# Altium PCB PCB2.PcbDoc
Units mil, origin at the board's own origin, x right, y up, seen from the top; angles counter-clockwise.
Board outline 6990 x 3955 mil, 2 copper layers (Top Layer, Bottom Layer); 67 components, 22 nets, 151 pads, 4 vias.
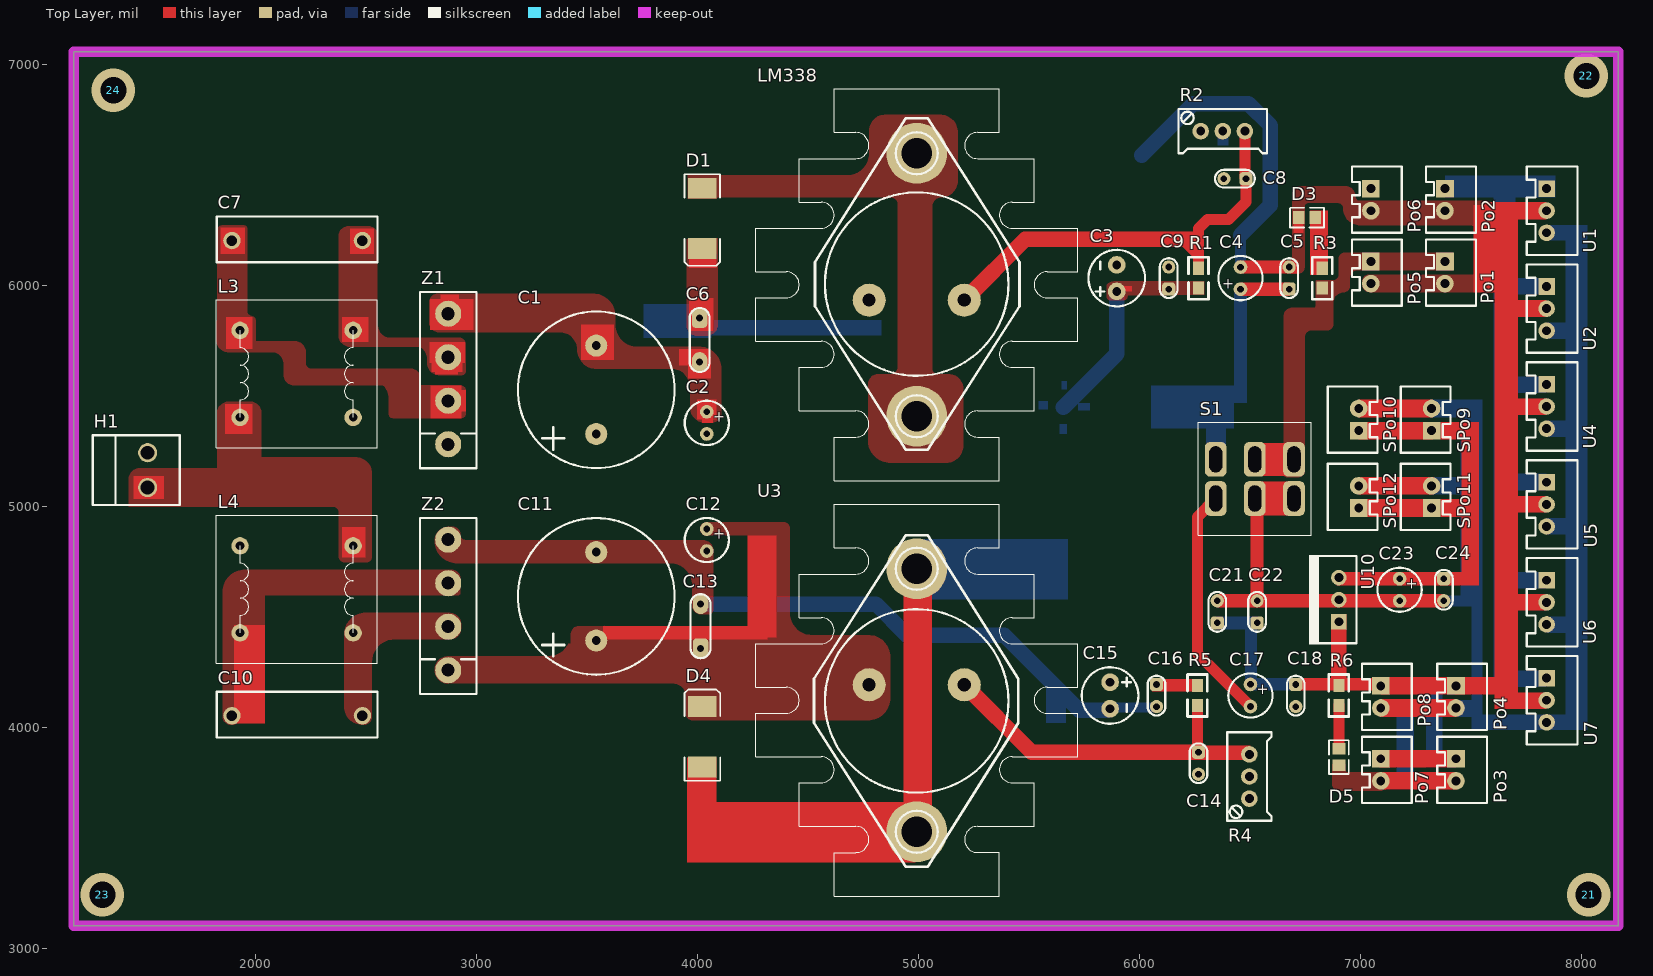
[diagram p0: Top Layer view]
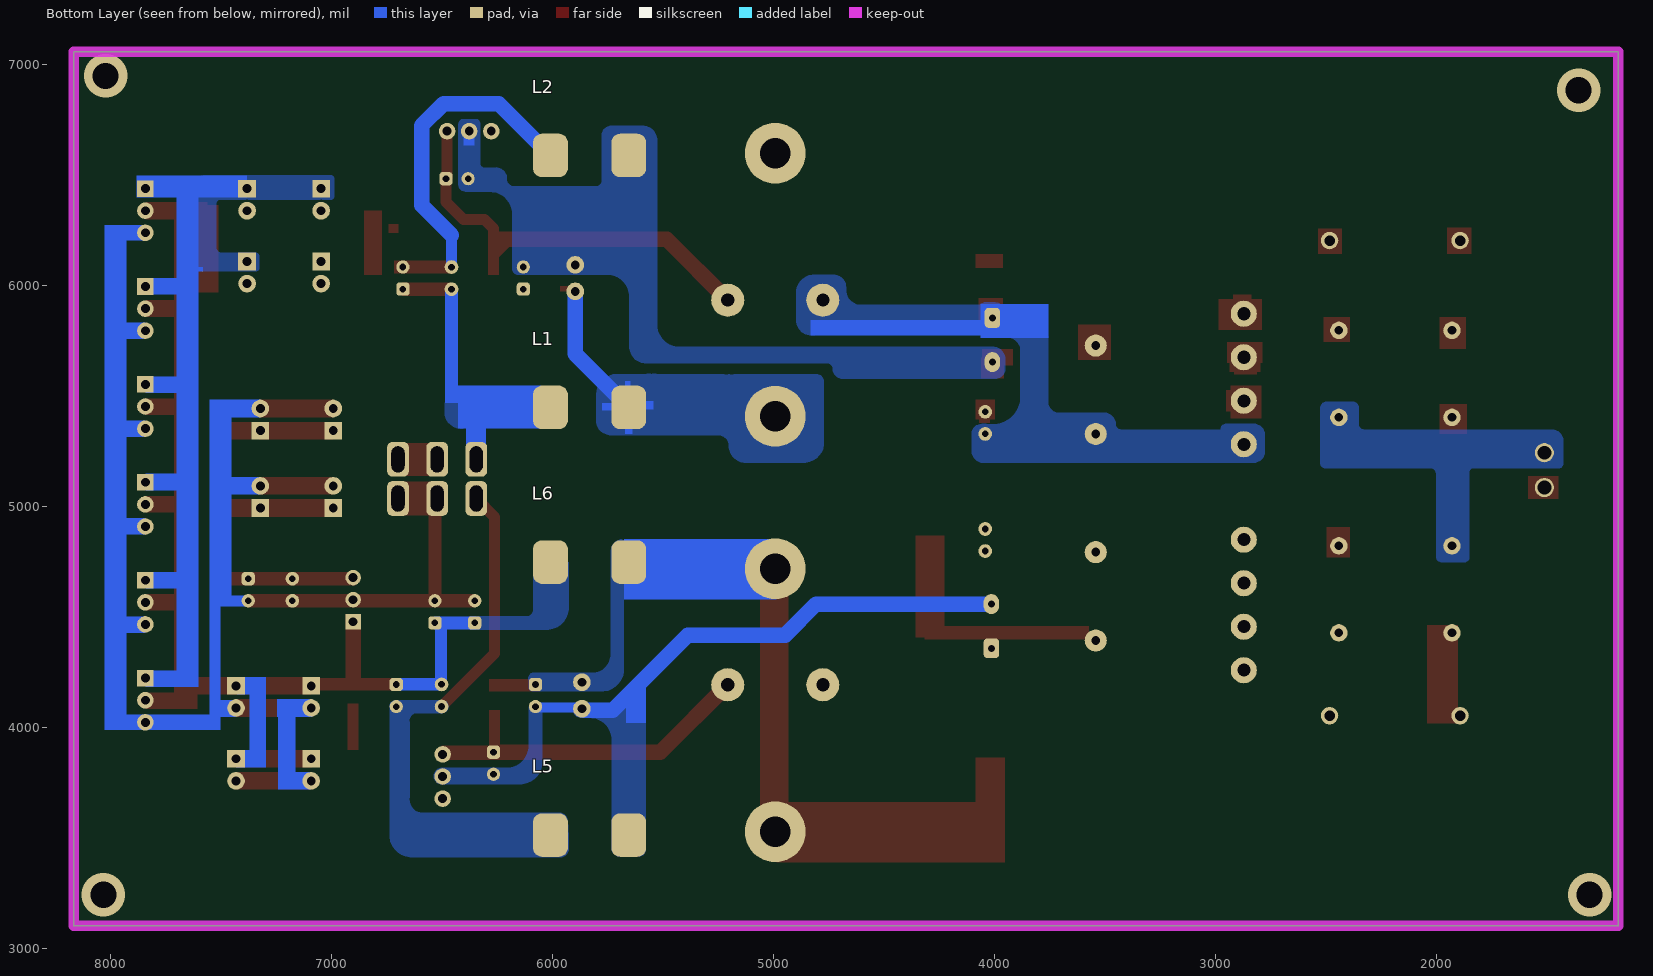
[diagram p1: Bottom Layer view, seen from below]

## Layer stack, top to bottom
Top Solder: solder mask 0.4, Solder Resist, Dk 3.5
Top Layer: signal copper 1.4
Dielectric 1: dielectric 12.6, FR-4, Dk 4.8
Bottom Layer: signal copper 1.4
Bottom Solder: solder mask 0.4, Solder Resist, Dk 3.5

## Board outline
1175,3105 8165,3105 8165,7060 1175,7060

## Design rules (kind name [scope] priority, off if disabled: settings)
Clearance [All] p1: gap=10
PlaneConnect [All] p1: planeconnectstyle=Direct reliefexpansion=20 reliefentries=4 reliefconductorwidth=10 reliefairgap=10
PolygonConnect [All] p1: connectstyle=Direct reliefconductorwidth=10 reliefentries=4 polygonreliefangle="90 Angle" airgapwidth=10
RoutingVias [All] p1: holewidth=28 width=50 viastyle="Through Hole" minholewidth=28 minwidth=50 maxholewidth=28 maxwidth=50
SolderMaskExpansion [All] p1: expansion=4
Width [All] p1: maxlimit=100 minlimit=10 preferedwidth=10
29 further rules are at their usual default settings.

## Components (designator, comment, footprint, x,y, rotation, side; value= is the part's Value field where it differs from the comment)
21 "螺丝孔" 固定过孔 8030,3245 r0 top
22 "螺丝孔" 固定过孔 8020,6950 r0 top
23 "螺丝孔" 固定过孔 1305,3245 r0 top
24 "螺丝孔" 固定过孔 1355,6885 r0 top
C1 "4700uF" 4700UF_50V 3540,5329.72 r90 top
C2 "22uF" 22UF_50V 4040,5430 r270 top
C3 "470uF" "C DIP DIA6.3" 5895,5975 r90 top
C4 "22uF" 22UF_50V 6455,5985 r90 top
C5 "10uF" 陶瓷电容 6675,5985.28 r270 top
C6 "0.1uF" 独石电容 4007.61,5855 r180 top
C7 "0.1uF" 安规电容 1891.32,6205 r270 top
C8 "Cap" 陶瓷电容 6480,6485 r0 top
C9 "Cap" 陶瓷电容 6130,5985.28 r270 top
C10 "Cap1" 安规电容 1891.32,4055 r270 top
C11 "4700uf" 4700UF_50V 3540,4395 r90 top
C12 "22uf" 22UF_50V 4040,4900 r270 top
C13 "0.1uf" 独石电容 4012,4360 r0 top
C14 "Cap" 陶瓷电容 6265,3890 r90 top
C15 "470uf" "C DIP DIA6.3" 5865,4206.51 r270 top
C16 "0.1uf" 陶瓷电容 6075,4196.23 r90 top
C17 "22uf" 22UF_50V 6500,4196.51 r270 top
C18 "10uf" 陶瓷电容 6705,4196.23 r90 top
C21 "Cap" 陶瓷电容 6350,4475 r270 top
C22 "Cap" 陶瓷电容 6530,4475 r270 top
C23 "Cap" 22UF_50V 7175,4675 r270 top
C24 "Cap" 陶瓷电容 7375,4675 r90 top
D1 "Diode 1N4004" SMC 4019.65,6305 r270 top
D3 "LED" 0805_s 6735,6295 r180 top
D4 "1N4002" SMC 4019.84,3960 r90 top
D5 "LED" 0805_s 6913.78,3846.93 r270 top
H1 "HT3.96-2P" HT39.6-2P-S 1510,5245 r0 top
L1 "Inductor Iron" "功率电感-12x12 - duplicate" 5830,5450 r0 bottom
L2 "Inductor Iron" "功率电感-12x12 - duplicate" 5830,6590 r0 bottom
L3 "扼流线圈" 扼流线圈 1928.19,5405 r90 top
L4 "扼流线圈" 扼流线圈 2440,4823.7 r270 top
L5 "SMD" "功率电感-12x12 - duplicate" 5830,3515 r0 bottom
L6 "SMD" "功率电感-12x12 - duplicate" 5830,4750 r0 bottom
LM338 "D1" LM338 5205,5935 r270 top
Po1 "Power_2Port" Power_S_2Port 7380,6110 r270 top
Po2 "Power_2Port" Power_S_2Port 7380,6440 r270 top
Po3 "Power_2Port" Power_S_2Port 7430,3860 r270 top
Po4 "Power_2Port" Power_S_2Port 7430,4190 r270 top
Po5 "Power_2Port" Power_S_2Port 7045,6110 r270 top
Po6 "Power_2Port" Power_S_2Port 7045,6440 r270 top
Po7 "Power_2Port" Power_S_2Port 7090,3860 r270 top
Po8 "Power_2Port" Power_S_2Port 7090,4190 r270 top
R1 "Res2" 0805 6265,6080 r270 top
R2 "可调电位器1" 电位器 6275,6700 r0 top
R3 "1k" 0805 6825,6080 r270 top
R4 "可调电位器1" 电位器 6495,3680 r90 top
R5 "RES" 0805 6260,4101.51 r90 top
R6 "RES" 0805 6900,4101.51 r90 top
S1 "双掷开关" SWITCH 6342.83,5215 r0 top
SPo9 "Power_2Port" Power_S_2Port 7320,5345 r90 top
SPo10 "Power_2Port" Power_S_2Port 6990,5345 r90 top
SPo11 "Power_2Port" Power_S_2Port 7320,4995 r90 top
SPo12 "Power_2Port" Power_S_2Port 6990,4995 r90 top
U1 "XH2.54-3p" XH2.54-3p 7840,6440 r270 top
U2 "XH2.54-3p" XH2.54-3p 7840,5997 r270 top
U3 "LM338" LM338 4775.02,4195 r90 top
U4 "XH2.54-3p" XH2.54-3p 7840,5554 r270 top
U5 "XH2.54-3p" XH2.54-3p 7840,5111 r270 top
U6 "XH2.54-3p" XH2.54-3p 7840,4668 r270 top
U7 "XH2.54-3p" XH2.54-3p 7840,4225 r270 top
U10 "LM2940" TO-220 6900,4480 r90 top
Z1 "整流桥" 整流桥 2870,5283.15 r180 top
Z2 "整流桥" 整流桥 2870,4260.87 r180 top

## Footprints (in the part's own frame and the unit in brackets; to place one, negate y for a bottom-side part, rotate by r counter-clockwise, add the part's x,y. Pads: shape width x height; smd on the part's side, far side on the other; paste and mask are expansions set on the pad)
22UF_50V [mil]
  round 62 hole 30: 1(0,0) 2(100,0)
  silkscreen extent -50,-100 150,100, body extent -47,-100 150,97, height 433
0805 [mil]
  rect 60x50 smd: 1(0,0) 2(90,0)
  silkscreen extent -50,-45 140,45
0805_s [mm]
  rect 1.3x1.499 smd: 1(0.425,-0.35) 2(-1.475,-0.35)
  silkscreen extent -2.47,-1.49 1.43,0.79
4700UF_50V [mil]
  round 100 hole 40: 1(0,0) 2(400,0)
  silkscreen extent -154,-354 554,354, body extent -160,-354 560,365, height 1628
"C DIP DIA6.3" [mil]
  round 80 hole 40: 1(0,0) 2(120,0)
  silkscreen extent -68,-128 188,128
HT39.6-2P-S [mm]
  round 2.2 hole 1.6: 1(0,0) 2(0,-4)
  silkscreen extent -6.3,-6 3.7,2
LM338 [mm]
  round 3.81 hole 1.5: 1(0,0) 2(0,-10.922)
  round 7 hole 3.5: 3(-16.891,-5.461) 3(13.335,-5.461)
  silkscreen extent -24.28,-23.96 20.72,13.04, body extent -21.25,-18.03 17.55,6.97, height 8.8
Power_S_2Port [mil]
  rect 80x80 hole 40: 1(0,0)
  round 80 hole 40: 2(100,0)
  silkscreen extent -100,-85 200,140
SMC [mm] "DO-214-AB/SMC; 2 C-Bend Leads; Body 7.9 x 5.9 mm, inc. leads (LxW)"
  rect 2.4x3.3 smd: 1(-3.475,0) 2(3.475,0)
  silkscreen extent -5.07,-2.05 5.43,2.05
SWITCH [mm]
  rrect50% 2.5x4 hole 1.5 slot 3 at 90 deg: 1(0,0) 2(4.5,0) 3(9,0) 4(9,-4.5) 5(4.5,-4.5) 6(0,-4.5)
  silkscreen extent -2,-8.75 11,4.25, body extent -1.85,-8.18 10.85,3.63, height 30.58
TO-220 [mil]
  rect 70x70 hole 40: 1(0,0)
  round 70 hole 40: 2(100,0) 3(200,0)
  silkscreen extent -102,-80 302,135
XH2.54-3p [mil]
  rect 75x75 hole 40: 1(0,0)
  round 75 hole 40: 2(100,0) 3(200,0)
  silkscreen extent -100,-90 300,140
"功率电感-12x12 - duplicate" [mm]
  rrect50% 4x5 smd: 1(-4.5,0) 2(4.5,0)
  body extent -6.08,-6.15 6.21,6.15, height 8
固定过孔 [mil]
安规电容 [mm]
  round 2 hole 1.2: 1(0,0) 2(0,15)
  silkscreen extent -2.75,-1.75 2.5,16.75, body extent -2.75,-1.75 2.6,16.75, height 13
扼流线圈 [mm]
  round 2 hole 1: 1(0,0) 2(10,0) 3(10,-13) 4(0,-13)
  silkscreen extent -3.5,-15.75 13.5,2.75
整流桥 [mm]
  round 3 hole 1.5: 1(0,0) 2(0,-5) 3(0,-10) 4(0,-15)
  silkscreen extent -3.25,-17.5 3.25,2.75
独石电容 [mil]
  rrect50% 70x90 hole 32: 1(0,0)
  oval 70x90 hole 32: 2(0,200)
  silkscreen extent -45,-45 45,245, body extent -77,-18 73,218, height 335
电位器 [mil]
  round 75 hole 40: 1(0,0) 2(100,0) 3(200,0)
  silkscreen extent -100,-100 300,100
陶瓷电容 [mil]
  rrect50% 60x60 hole 30: 1(0,0)
  round 60 hole 30: 2(-100,0)
  silkscreen extent -140,-40 40,40, body extent -158,-49 59,49, height 217

## Part data
C1 C3 C4 C5 C6 C7 C11 C12 C13 C15 C16 C17 C18: library part Cap
C2: library part Cap, "Capacitor"
C8 C9 C21 C22 C23 C24: library part Cap_1
D1: "1 Amp General Purpose Rectifier"
D4: library part Diode, "Default Diode"
L1 L2: "Magnetic-Core Inductor"
L5 L6: library part 功率电感
LM338: library part LM338
R1: "Resistor"
R3: library part RES, "1K"
U3: library part LM338_1

## Via types
v1: diameter 196.85, hole 118.11, Top Layer to Bottom Layer, 4 vias

## Nets (pads, with @x,y where several pads share a name; then routed paths per layer and width w, separated by ;. In a path a pad name is that pad's centre, name@x,y a point inside that pad or via, vN(x,y) a via of type N, cw(c..) or ccw(c..) an arc to the next point about the centre after c; other vN are vias at no path point)
NetC1_1: C1.1 C2.2 C6.1 D1.2 LM338.2 Z1.1
NetC1_2: C1.2 C2.1 C3.2 C6.2 C8.2 C9.2 L2.1 R2.2 Z1.4
NetC3_1: C3.1 C9.1 D1.1 L1.1 LM338.3 R1.2 | length 625.3
  Bottom Layer w70: L1.1 5895,5692.17 C3.1
NetC4_1: C4.1 C5.1 L1.2 S1.1
NetC4_2: C4.2 C5.2 C17.1 C18.1 C21.1 C22.1 D3.1 L2.2 L6.2 Po1.2 Po2.2 Po3.1 Po4.1 Po5.2 Po6.2 Po7.1 Po8.1 R6.2 U1.2 U2.2 U4.2 U5.2 U6.2 U7.2 U10.1 | length 1417.5
  Bottom Layer w50: C4.2 6455,6230
  Bottom Layer w70: L2.2 6242.17,6825 6490,6825 6590,6725 6590,6365 6455,6230
NetC7_1: C7.1 L3.2 Z1.2
NetC7_2: C7.2 L3.3 Z1.3
NetC8_1: C8.1 LM338.1 R1.1 R2.3 | length 1969.7
  Top Layer w10: R1.1 6265,6140 ; C8.1@6475,6490 C8.1
  Top Layer w50: 6195,6210 6265,6140 6265,6260 6305,6300 6400,6300 6480,6380 C8.1 ; C8.1@6475,6490 R2.3
  Top Layer w70: LM338.1 5480,6210 6195,6210
NetC10_1: C10.1 L4.3 Z2.3
NetC10_2: C10.2 L4.2 Z2.2
NetC11_1: C11.1 C12.1 C13.1 D4.2 U3.1 Z2.1
NetC11_2: C11.2 C12.2 C13.2 C14.2 C15.2 C16.2 L5.1 R4.2 Z2.4 | length 2054.5
  Bottom Layer w50: C15.2@5858.49,4080 C15.2
  Bottom Layer w70: C13.2 4805,4560 4945,4420 5385,4420 5725,4080 C15.2@5858.49,4080
NetC14_1: C14.1 R4.3 R5.1 U3.2 | length 1186.3
  Top Layer w70: U3.2 5510.02,3890 C14.1
NetC15_1: C15.1 C16.1 D4.1 L6.1 R5.2 U3.3
NetC17_2: C17.2 C18.2 L5.2 S1.6 | length 1075
  Top Layer w50: S1.6 6260,4955 6260,4336.51 C17.2
NetC21_2: C21.2 C22.2 C23.2 C24.2 D5.1 Po3.2 Po4.2 Po7.2 Po8.2 S1.4 S1.5 SPo9.2 SPo10.2 SPo11.2 SPo12.2 U1.3 U2.3 U4.3 U5.3 U6.3 U7.3 U10.2
NetC23_1: C23.1 C24.1 SPo9.1 SPo10.1 SPo11.1 SPo12.1 U10.3
NetD3_2: D3.2 R3.1
NetD5_2: D5.2 R6.1
NetH1_1: H1.1 L3.4 L4.4
NetH1_2: H1.2 L3.1 L4.1
NetPo1_1: Po1.1 Po2.1 Po5.1 Po6.1 R3.2 S1.2 S1.3 U1.1 U2.1 U4.1 U5.1 U6.1 U7.1
pads on no net: R2.1 R4.1
copper on no net:
  other v1: 1305,3245 8030,3245 1355,6885 8020,6950

## Polygon pours and split planes (outlines as drawn)
NetC21_2 on Top Layer "Top Layer-No Net" (solid, pour order 76): 6870,3835 6870,3745 ccw(c6900,3745) 6900,3715 7085,3715 ccw(c7085,3760) 7130,3760 ccw(c7090,3760) 7090,3800 6940,3800 cw(c6940,3810) 6930,3810 6930,3835
NetPo1_1 on Top Layer "Top Layer-No Net" (solid, pour order 60): 6695,5135 6715,5135 ccw(c6715,5165) 6745,5165 6745,5765 cw(c6780,5765) 6780,5800 6850,5800 ccw(c6850,5825) 6875,5825 6875,5925 cw(c6920,5925) 6920,5970 ccw(c6920,6000) 6950,6000 6950,6040 cw(c6980,6040) 6980,6070 7045,6070 7380,6070 7410,6070 ccw(c7410,6080) 7420,6080 7420,6090 7420,6145 ccw(c7415,6145) 7415,6150 6925,6150 ccw(c6925,6125) 6900,6125 6900,6050 cw(c6875,6050) 6875,6025 6800,6025 ccw(c6800,6020) 6795,6020 6795,5910 cw(c6785,5910) 6785,5900 6690,5900 ccw(c6690,5860) 6650,5860 6650,5160 cw(c6645,5160) 6645,5155 ccw(c6665,5155) 6665,5135 6695,5135
NetC11_2 on Top Layer "Top Layer-No Net" (solid, pour order 54): 2810,4850 2810,4845 ccw(c2910,4845) 2910,4745 3540,4745 3875,4745 cw(c3875,4645) 3975,4645 3975,4550 ccw(c4010,4550) 4010,4515 4050,4515 ccw(c4050,4535) 4070,4535 4070,4800 ccw(c4020,4800) 4020,4850 3535,4850 2950,4850 cw(c2950,4875) 2925,4875 ccw(c2890,4875) 2890,4910 2870,4910 ccw(c2870,4850) 2810,4850
NetC11_1 on Top Layer "Top Layer-No Net" (solid, pour order 52): 2810,4260 ccw(c2870,4260) 2870,4200 3890,4200 cw(c3890,4145) 3945,4145 3945,4065 ccw(c3975,4065) 3975,4035 4770,4035 ccw(c4770,4135) 4870,4135 4870,4190 4870,4320 ccw(c4770,4320) 4770,4420 4520,4420 4515,4420 cw(c4515,4520) 4415,4520 4415,4905 ccw(c4390,4905) 4390,4930 4040,4930 ccw(c4040,4900) 4010,4900 ccw(c4040,4900) 4040,4870 4215,4870 cw(c4215,4770) 4315,4770 4315,4510 cw(c4225,4510) 4225,4420 4185,4420 3655,4420 cw(c3642.5,4437.5) 3625,4425 ccw(c3580,4415) 3570,4460 3460,4460 ccw(c3460,4425) 3425,4425 3425,4380 3425,4425 cw(c3325,4425) 3325,4325 2870,4325 ccw(c2870,4265) 2810,4265
NetC10_2 on Top Layer "Top Layer-No Net" (solid, pour order 50): 2525,4050 cw(c2490,4050) 2490,4015 2480,4015 cw(c2480,4095) 2400,4095 2400,4425 cw(c2495,4425) 2495,4520 2875,4520 cw(c2875,4465) 2930,4465 2930,4455 cw(c2875,4455) 2875,4400 2625,4400 ccw(c2625,4300) 2525,4300 2525,4050
NetC10_1 on Top Layer "Top Layer-No Net" (solid, pour order 48): 1850,4050 ccw(c1885,4050) 1885,4015 1890,4015 1895,4015 ccw(c1895,4050) 1930,4050 1930,4335 cw(c1970,4335) 1970,4375 ccw(c1970,4445) 2040,4445 2040,4600 2915,4600 ccw(c2915,4610) 2925,4610 2925,4675 ccw(c2885,4675) 2885,4715 2830,4715 1950,4715 ccw(c1950,4615) 1850,4615 1850,4050
NetC4_2 on Top Layer "Top Layer-No Net" (solid, pour order 46): 6685,6275 ccw(c6690,6275) 6690,6270 6750,6270 6745,6270 6745,6360 cw(c6760,6360) 6760,6375 6895,6375 cw(c6895,6350) 6920,6350 ccw(c6995,6350) 6995,6275 7055,6275 7490,6275 cw(c7490,6240) 7525,6240 7525,6075 cw(c7500,6075) 7500,6050 7035,6050 ccw(c7035,6020) 7005,6020 7005,6010 ccw(c7045,6010) 7045,5970 7500,5970 ccw(c7500,6070) 7600,6070 7600,6350 ccw(c7565,6350) 7565,6385 7050,6385 6995,6385 cw(c6995,6405) 6975,6405 ccw(c6930,6405) 6930,6450 6725,6450 ccw(c6725,6415) 6690,6415 6690,6340 6690,6270
NetH1_2 on Top Layer "Top Layer-No Net" (solid, pour order 0): 1425,5000 1900,5000 2350,5000 cw(c2350,4975) 2375,4975 2375,4775 ccw(c2400,4775) 2400,4750 2500,4750 ccw(c2500,4775) 2525,4775 2525,5150 ccw(c2450,5150) 2450,5225 2025,5225 2025,5425 ccw(c1975,5425) 1975,5475 1885,5475 1875,5475 ccw(c1875,5425) 1825,5425 1825,5225 1825,5175 1650,5175 1475,5175 ccw(c1474.99,5125.01) 1425,5125 1425,5075
NetC7_1 on Top Layer "Top Layer-No Net" (solid, pour order 4): 1820,6250 1820,5755 ccw(c1875,5755) 1875,5700 2075,5700 cw(c2075,5650) 2125,5650 2125,5600 ccw(c2175,5600) 2175,5550 2575,5550 2582.32,5542.68 cw(c2539.64,5500) 2600,5500 2600,5425 ccw(c2625,5425) 2625,5400 2925,5400 ccw(c2925,5425) 2950,5425 2950,5525 ccw(c2925,5525) 2925,5550 2750,5550 2745,5550 2745,5580 ccw(c2700,5580) 2700,5625 2250,5625 cw(c2250,5650) 2225,5650 2225,5700 ccw(c2175,5700) 2175,5750 2000,5750 2000,5840 ccw(c1975,5840) 1975,5865 1855,5865 ccw(c1855,5830) 1820,5830 1820,5740
NetC7_1 on Top Layer "Top Layer-No Net" (solid, pour order 7): 2000,5750 1850,5750 cw(c1850,5775) 1825,5775 1825,6250 cw(c1850,6250) 1850,6275 1935,6275 1940,6275 1945,6275 cw(c1945,6260) 1960,6260 1960,5884.97 ccw(c1979.97,5884.97) 1979.97,5865
NetC7_2 on Top Layer "Top Layer-No Net" (solid, pour order 9): 2375,6225 2375,5775 ccw(c2425,5775) 2425,5725 2725,5725 cw(c2725,5675) 2775,5675 2775,5650 ccw(c2830,5650) 2830,5595 2925,5595 2930,5595 ccw(c2930,5615) 2950,5615 2950,5625 2950,5735 ccw(c2920,5735) 2920,5765 2610,5765 cw(c2610,5825) 2550,5825 2550,6225 2550,6230 ccw(c2510,6230) 2510,6270 2420,6270 ccw(c2420,6225) 2375,6225
NetC1_2 on Top Layer "Top Layer-No Net" (solid, pour order 16): 2785,5925 2785,5835 ccw(c2830,5835) 2830,5790 3375,5790 cw(c3375,5710) 3455,5710 ccw(c3540,5710) 3540,5625 3880,5625 cw(c3880,5540) 3965,5540 3965,5450 ccw(c4035,5450) 4035,5380 4040,5380 4060,5380 ccw(c4060,5425) 4105,5425 4105,5625 ccw(c4005,5625) 4005,5725 4000,5725 3725,5725 cw(c3725,5825) 3625,5825 3625,5830 3625,5865 ccw(c3525,5865) 3525,5965 2825,5965 ccw(c2825,5925) 2785,5925
NetC1_1 on Top Layer "Top Layer-No Net" (solid, pour order 20): 3955,6215 ccw(c3955,6210) 3950,6210 3950,5820 ccw(c3995,5820) 3995,5775 4000,5775 4040,5775 ccw(c4040,5825) 4090,5825 4090,6215
NetC3_1 on Top Layer "Top Layer-No Net" (solid, pour order 22): 3955,6395 4085,6395 cw(c4090,6395) 4090,6400 4875,6400 cw(c4875,6370) 4905,6370 4905,5635 cw(c4870,5635) 4870,5600 4815,5600 ccw(c4815,5555) 4770,5555 4770,5350 4770,5300 ccw(c4870,5300) 4870,5200 4955,5200 5125,5200 ccw(c5125,5275) 5200,5275 5200,5535 ccw(c5135,5535) 5135,5600 5085,5600 cw(c5085,5625) 5060,5625 5060,6360 cw(c5100,6360) 5100,6400 ccw(c5100,6475) 5175,6475 5175,6690 5175,6695 ccw(c5095,6695) 5095,6775 4850,6775 ccw(c4850,6700) 4775,6700 4775,6600 cw(c4675,6600) 4675,6500 4580,6500 3955,6500
NetC3_1 on Top Layer "Top Layer-No Net" (solid, pour order 30): 6290,5960 6290,6020 5886.21,6020 ccw(c5886.21,5968.79) 5850,6005 5850,5950 ccw(c5865,5950) 5865,5935 5895,5935 5925,5935 ccw(c5925,5955) 5945,5955
NetC4_2 on Top Layer "Top Layer-No Net" (solid, pour order 36): 6675,6055 6715,6055 ccw(c6715,6085) 6745,6085 6745,6340 6690,6340 6690,6130 cw(c6675,6130) 6675,6115
NetC4_2 on Bottom Layer "Top Layer-No Net" (solid, pour order 74): 5925,4750 5925,4545 ccw(c6025,4545) 6025,4445 6350,4445 6370,4445 ccw(c6370,4455) 6380,4455 6380,4495 ccw(c6370,4495) 6370,4505 6116.65,4505 cw(c6116.65,4536.65) 6085,4536.65 6085,4750
NetC17_2 on Bottom Layer "Top Layer-No Net" (solid, pour order 70): 5925,3510 5925,3450 ccw(c5960,3450) 5960,3415 6635,3415 ccw(c6635,3515) 6735,3515 6735,4090 6735,4100 ccw(c6710,4100) 6710,4125 6505,4125 cw(c6505,4130) 6500,4130 6500,4125 6495,4125 ccw(c6495,4100) 6470,4100 6470,4095 ccw(c6500,4095) 6500,4065 6620,4065 cw(c6612.5,4032.5) 6645,4025 6645,3855 6645,3685 cw(c6582.5,3677.5) 6590,3615 5965,3615 ccw(c5965,3580) 5930,3580
NetC11_2 on Bottom Layer "Top Layer-No Net" (solid, pour order 68): 6045,4095 6045,3845 ccw(c6145,3845) 6145,3745 6495,3745 6500,3745 ccw(c6500,3780) 6535,3780 ccw(c6495,3780) 6495,3820 6260,3820 6205,3820 cw(c6205,3920) 6105,3920 6105,4095
NetC11_2 on Bottom Layer "Top Layer-No Net" (solid, pour order 64): 5575,3450 ccw(c5605,3450) 5605,3420 5695,3420 ccw(c5695,3455) 5730,3455 5730,3945 cw(c5830,3945) 5830,4045 5865,4045 ccw(c5865,4085) 5905,4085 ccw(c5890,4085) 5890,4100 5615,4100 ccw(c5615,4060) 5575,4060 5575,3980
NetC15_1 on Bottom Layer "Top Layer-No Net" (solid, pour order 62): 5675,4855 cw(c5675,4795) 5735,4795 5735,4460 5735,4325 ccw(c5817.5,4332.5) 5825,4250 6090,4250 cw(c6077.5,4222.5) 6105,4210 6105,4185 6105,4180 cw(c6090,4180) 6090,4165 5775,4165 cw(c5775,4265) 5675,4265 5675,4580
NetC4_1 on Bottom Layer "Top Layer-No Net" (solid, pour order 56): 6395,5355 ccw(c6410,5430) 6485,5415 6485,5470 6425,5470
NetPo1_1 on Bottom Layer "Top Layer-No Net" (solid, pour order 42): 7340,6065 7575,6065 ccw(c7575,6090) 7600,6090 7600,6475 ccw(c7575,6475) 7575,6500 7000,6500 ccw(c7000,6485) 6985,6485 6985,6405 ccw(c7000,6405) 7000,6390 7500,6390 cw(c7500,6370) 7520,6370 7520,6175 cw(c7495,6175) 7495,6150 7340,6150 ccw(c7340,6135) 7325,6135 7325,6080 ccw(c7340,6080) 7340,6065
NetH1_1 on Bottom Layer "Top Layer-No Net" (solid, pour order 2): 1425,5200 1425,5300 cw(c1475,5300) 1475,5350 2325,5350 ccw(c2325,5375) 2350,5375 2350,5450 cw(c2375,5450) 2375,5475 2495,5475 cw(c2495,5445) 2525,5445 2525,5200 cw(c2500,5200) 2500,5175 2025,5175 ccw(c2025,5150) 2000,5150 2000,4775 cw(c1975,4775) 1975,4750 1875,4750 1870,4750 cw(c1870,4770) 1850,4770 1850,4775 1850,5155 ccw(c1830,5155) 1830,5175 1825,5175 1450,5175 1445,5175 cw(c1445,5195) 1425,5195
NetC1_1 on Bottom Layer "Top Layer-No Net" (solid, pour order 11): 2775,5250 ccw(c2825,5250) 2825,5200 3600,5200 3595,5200 3600,5200 ccw(c3600,5250) 3650,5250 3650,5375 ccw(c3600,5375) 3600,5425 3500,5425 ccw(c3500,5375) 3450,5375 cw(c3425,5375) 3425,5350 3365,5350 2975,5350 ccw(c2950,5350) 2950,5375 2825,5375 ccw(c2825,5325) 2775,5325
NetC1_1 on Bottom Layer "Top Layer-No Net" (solid, pour order 18): 3609.95,5200 4050,5200 ccw(c4050,5250) 4100,5250 4100,5330 ccw(c4055,5330) 4055,5375 4035,5375 cw(c4008.75,5501.25) 3882.5,5475 3882.5,5602.5 3882.5,5725 cw(c3948.65,5697.6) 3921.25,5763.75 cw(c3964.2,5698.46) 3980,5775 4025,5775 4030,5775 ccw(c4030,5825) 4080,5825 4080,5880 ccw(c4035,5880) 4035,5925 4000,5925 ccw(c4000,5860) 3935,5860 cw(c3907.5,5867.5) 3900,5840 3865,5840 3830,5840 ccw(c3835,5760) 3755,5755 3755,5475 cw(c3705,5475) 3705,5425 3600,5425
NetC1_1 on Bottom Layer "Top Layer-No Net" (solid, pour order 24): 4040.96,5775.42 4040.96,5775 ccw(c4825,5845) 4895,5845 4895,5850 4895,5970 ccw(c4815,5970) 4815,6050 4725,6050 ccw(c4725,5995) 4670,5995 4670,5980 cw(c4605,5980) 4605,5915 4053.95,5915 cw(c4053.95,5925) 4043.95,5925
NetC3_1 on Bottom Layer "Top Layer-No Net" (solid, pour order 26): 4770,5295 4770,5290 ccw(c4860,5290) 4860,5200 5125,5200 ccw(c5125,5275) 5200,5275 cw(c5250,5275) 5250,5325 5700,5325 5735,5325 ccw(c5735,5390) 5800,5390 5800,5500 ccw(c5707.5,5507.5) 5715,5600 5575,5600 ccw(c5562.5,5569.83) 5550,5600 ccw(c5537.5,5569.83) 5525,5600 cw(c5520,5625.12) 5515,5600 cw(c5510,5625.13) 5505,5600 cw(c5497.5,5637.7) 5490,5600 cw(c5485,5625.13) 5480,5600 5350,5600 5225,5600 cw(c5212.5,5630.17) 5200,5600 cw(c5187.5,5630.17) 5175,5600 4805,5600 ccw(c4805,5565) 4770,5565 4770,5490
NetC1_2 on Bottom Layer "Top Layer-No Net" (solid, pour order 28): 3950,5625 ccw(c3995,5625) 3995,5580 4035,5580 4685,5580 ccw(c4685,5625) 4730,5625 cw(c4755,5625) 4755,5650 5105,5650 5575,5650 ccw(c5575,5725) 5650,5725 5650,5950 cw(c5750,5950) 5750,6050 5905,6050 6155,6050 ccw(c6155,6075) 6180,6075 6180,6325 cw(c6280,6325) 6280,6425 6375,6425 ccw(c6375,6475) 6425,6475 6425,6485 6425,6490 ccw(c6380,6490) 6380,6535 6260,6535 ccw(c6255,6485) 6205,6490 cw(c6170,6485) 6175,6450 5775,6450 5800,6450 cw(c5800,6475) 5775,6475 5775,6680 ccw(c5730,6680) 5730,6725 5695,6725 5590,6725 ccw(c5590,6660) 5525,6660 5525,5825 cw(c5425,5825) 5425,5725 4630,5725 4005,5725 ccw(c4005,5670) 3950,5670 3950,5665
NetC1_2 on Bottom Layer "Top Layer-No Net" (solid, pour order 34): 6425,6475 6425,6725 ccw(c6390,6725) 6390,6760 6385,6760 6355,6760 ccw(c6355,6730) 6325,6730 6325,6555 cw(c6305,6555) 6305,6535 ccw(c6305,6525) 6295,6525 6295,6430 ccw(c6300,6430) 6300,6425 6384.95,6425 ccw(c6384.95,6465.05) 6425,6465.05 6425,6475

## Keep-outs
Keep-Out Layer:
  the board outline again, w47.24

## Other copper
Top Layer:
  rectangle net NetC10_1: 1900,4020 2040,4465
  rectangle net NetC8_1: 6195,6200 6245,6245
  rectangle net NetC4_2: 7425,4150 7685,4230
  rectangle net NetC4_2: 7650,5860 7840,5935
  rectangle net NetC4_2: 7630,5415 7840,5490
  rectangle net NetC4_2: 7655,4975 7840,5050
  rectangle net NetC4_2: 7665,4530 7840,4605
  rectangle net NetC4_2: 7630,4085 7840,4160
  rectangle net NetC4_2: 7509.85,5970 7645,6365
  rectangle net NetC4_2: 7605,4085 7710,6380
  rectangle net NetC4_2: 7560,6300 7840,6380
  rectangle net NetC23_1: 7375,4645 7535,4705
  rectangle net NetC23_1: 7360,4955 7505,5035
  rectangle net NetC23_1: 7360,5305 7520,5385
  rectangle net NetC23_1: 7455,4650 7535,5385
  rectangle net NetC21_2: 7085,4050 7435,4130
  rectangle net NetC4_2: 7085,3820 7430,3900
  rectangle net NetC4_2: 7090,4150 7430,4230
  rectangle net NetC23_1: 6990,4955 7330,5035
  rectangle net NetC21_2: 6990,5055 7330,5135
  rectangle net NetC23_1: 6990,5305 7325,5385
  rectangle net NetC21_2: 6990,5405 7325,5485
  rectangle net NetC21_2: 7090,3720 7435,3800
  rectangle net NetC11_1: 3570,4400 4314.57,4460
  rectangle net NetC23_1: 6890,4645 7375,4705
  rectangle net NetD5_2: 6875,3900 6925,4110
  rectangle net NetC4_2: 6865,4180 6935,4515
  rectangle net NetC4_2: 6705,4170 7100,4225
  rectangle net NetC21_2: 6525,4960 6705,5115
  rectangle net NetC21_2: 6500,4575 6560,5000
  rectangle net NetC21_2: 6350,4545 7380,4605
  rectangle net NetC14_1: 6265,3855 6500,3920
  rectangle net NetC14_1: 6235,3900 6285,4080
  rectangle net NetC15_1: 6055,4165 6285,4220
  rectangle net NetPo1_1: 6520,5140 6710,5290
  rectangle net NetC15_1: 4930,3445 5060,4720
  rectangle net NetC15_1: 3950,3390 4085,3865
  rectangle net NetC15_1: 3950,3390 4985,3665
  rectangle net NetC11_1: 4224.8,4410 4355,4869.52
  rectangle net NetC4_2: 6675,6055 6714.9,6115
  rectangle net NetC3_1: 5925,5975 5965,6000
  rectangle net NetC8_1: 6240,6050 6290,6145
  rectangle net NetH1_2: 1445,5035 1585,5140
  rectangle net NetH1_2: 1860,5330 1985,5465
  rectangle net NetC7_1: 1865,5715 1985,5860
  rectangle net NetC7_2: 2390,5745 2510,5860
  rectangle net NetC7_1: 1840,6145 1950,6265
  rectangle net NetC7_2: 2425,6145 2535,6260
  rectangle net NetC1_2: 2788.32,5800 2985,5940.98
  rectangle net NetC1_2: 2835,5922.95 2919.25,5960
  rectangle net NetC1_2: 3470,5665 3620,5825
  rectangle net NetC1_2: 3955,5580 4060,5675
  rectangle net NetC1_2: 3915,5640 4055,5715
  rectangle net NetC1_1: 3960,5795 4070,5945
  rectangle net NetC1_1: 3960,6080 4085,6145
  rectangle net NetC1_2: 3995,5395 4085,5485
  rectangle net NetC1_2: 4017.64,5380 4068.95,5395.63
  rectangle net NetC7_1: 2790,5400 2929.97,5550
  rectangle net NetC7_1: 2919.25,5430.75 2950,5529.25
  rectangle net NetC7_2: 2785,5650 2945,5745
  rectangle net NetC7_2: 2795,5610 2935,5660
  rectangle net NetC7_2: 2810,5600 2915,5625
  rectangle net NetH1_2: 2390,4770 2495,4910
  rectangle net NetD3_2: 6770,6050 6850,6340
  rectangle net NetC4_1: 6455,5955 6680,6015
  rectangle net NetC4_2: 6450,6055 6675,6115
  rectangle net NetC4_2: 6695,6240 6740,6280
Bottom Layer:
  rectangle net NetC21_2: 7500,3990 7840,4060
  rectangle net NetC21_2: 7840,6205 8015,6275
  rectangle net NetC21_2: 7840,5760 8020,5835
  rectangle net NetC21_2: 7840,5315 7990,5390
  rectangle net NetC21_2: 7840,4875 8020,4950
  rectangle net NetC21_2: 7840,4430 7995,4505
  rectangle net NetC21_2: 7840,3990 8025,4060
  rectangle net NetC21_2: 7925,4000 8025,6275
  rectangle net NetC21_2: 7500,4050 7550,5485
  rectangle net NetC21_2: 7430,4050 7550,4125
  rectangle net NetPo1_1: 7660,5960 7835,6035
  rectangle net NetPo1_1: 7655,5515 7840,5590
  rectangle net NetPo1_1: 7670,5075 7840,5150
  rectangle net NetPo1_1: 7655,4630 7840,4705
  rectangle net NetPo1_1: 7655,4185 7840,4260
  rectangle net NetPo1_1: 7579.97,6065 7625,6085
  rectangle net NetPo1_1: 7600,4185 7700,6500
  rectangle net NetPo1_1: 7380,6400 7880,6500
  rectangle net NetC21_2: 7090,3720 7230,3800
  rectangle net NetC21_2: 7085,4050 7245,4130
  rectangle net NetC21_2: 7160,3720 7240,4130
  rectangle net NetC4_2: 7315,3820 7430,3900
  rectangle net NetC4_2: 7315,4150 7425,4230
  rectangle net NetC4_2: 7295,3820 7370,4230
  rectangle net NetC21_2: 7375,4550 7530,4600
  rectangle net NetC21_2: 7320,5055 7530,5135
  rectangle net NetC21_2: 7320,5405 7530,5485
  rectangle net NetC21_2: 7450,4550 7530,5485
  rectangle net NetC4_2: 6500,4170 6715,4225
  rectangle net NetC4_2: 6475,4200 6530,4505
  rectangle net NetC4_2: 6345,4445 6535,4505
  rectangle net NetC11_2: 5575,4125 5635,4205
  rectangle net NetC11_2: 5575,4022.3 5665,4125
  rectangle net NetC11_2: 5835,4070 6080,4115
  rectangle net NetC15_1: 4985,4580 5675,4855
  rectangle net NetC4_1: 6245,5355 6425,5550
  rectangle net NetC4_1: 6425,5470 6485,5985
  rectangle net NetC4_1: 6300,5160 6390,5550
  rectangle net NetC1_1: 3754.62,5763.75 4061.04,5917.6
  rectangle net NetC1_1: 4039.95,5775 4830,5845
  rectangle net NetC3_1: 5720,5435 5775,5470
  rectangle net NetC3_1: 5540,5440 5585,5480
  rectangle net NetC3_1: 5645,5530 5670,5570
  rectangle net NetC3_1: 5635,5330 5670,5375
  rectangle net NetC1_2: 6350,6635 6400,6675
  rectangle net NetC4_1: 6050,5355 6245,5550

## Text inside footprints (layer, text, board x,y; h text height)
C2: Top Overlay "+" at 4075,5435 h50 r270
C4: Top Overlay "+" at 6420,5980 h50 r90
C12: Top Overlay "+" at 4075,4905 h50 r270
C17: Top Overlay "+" at 6535,4201.51 h50 r270
C23: Top Overlay "+" at 7210,4680 h50 r270